# Altium PCB PCB1.PcbDoc
Units mil, origin at the board's own origin, x right, y up, seen from the top; angles counter-clockwise.
Board outline 1735 x 2140 mil, 2 copper layers (Top Layer, Bottom Layer); 28 components, 23 nets, 98 pads, 74 vias.
Unrouted connection lines stored in the file: 8.
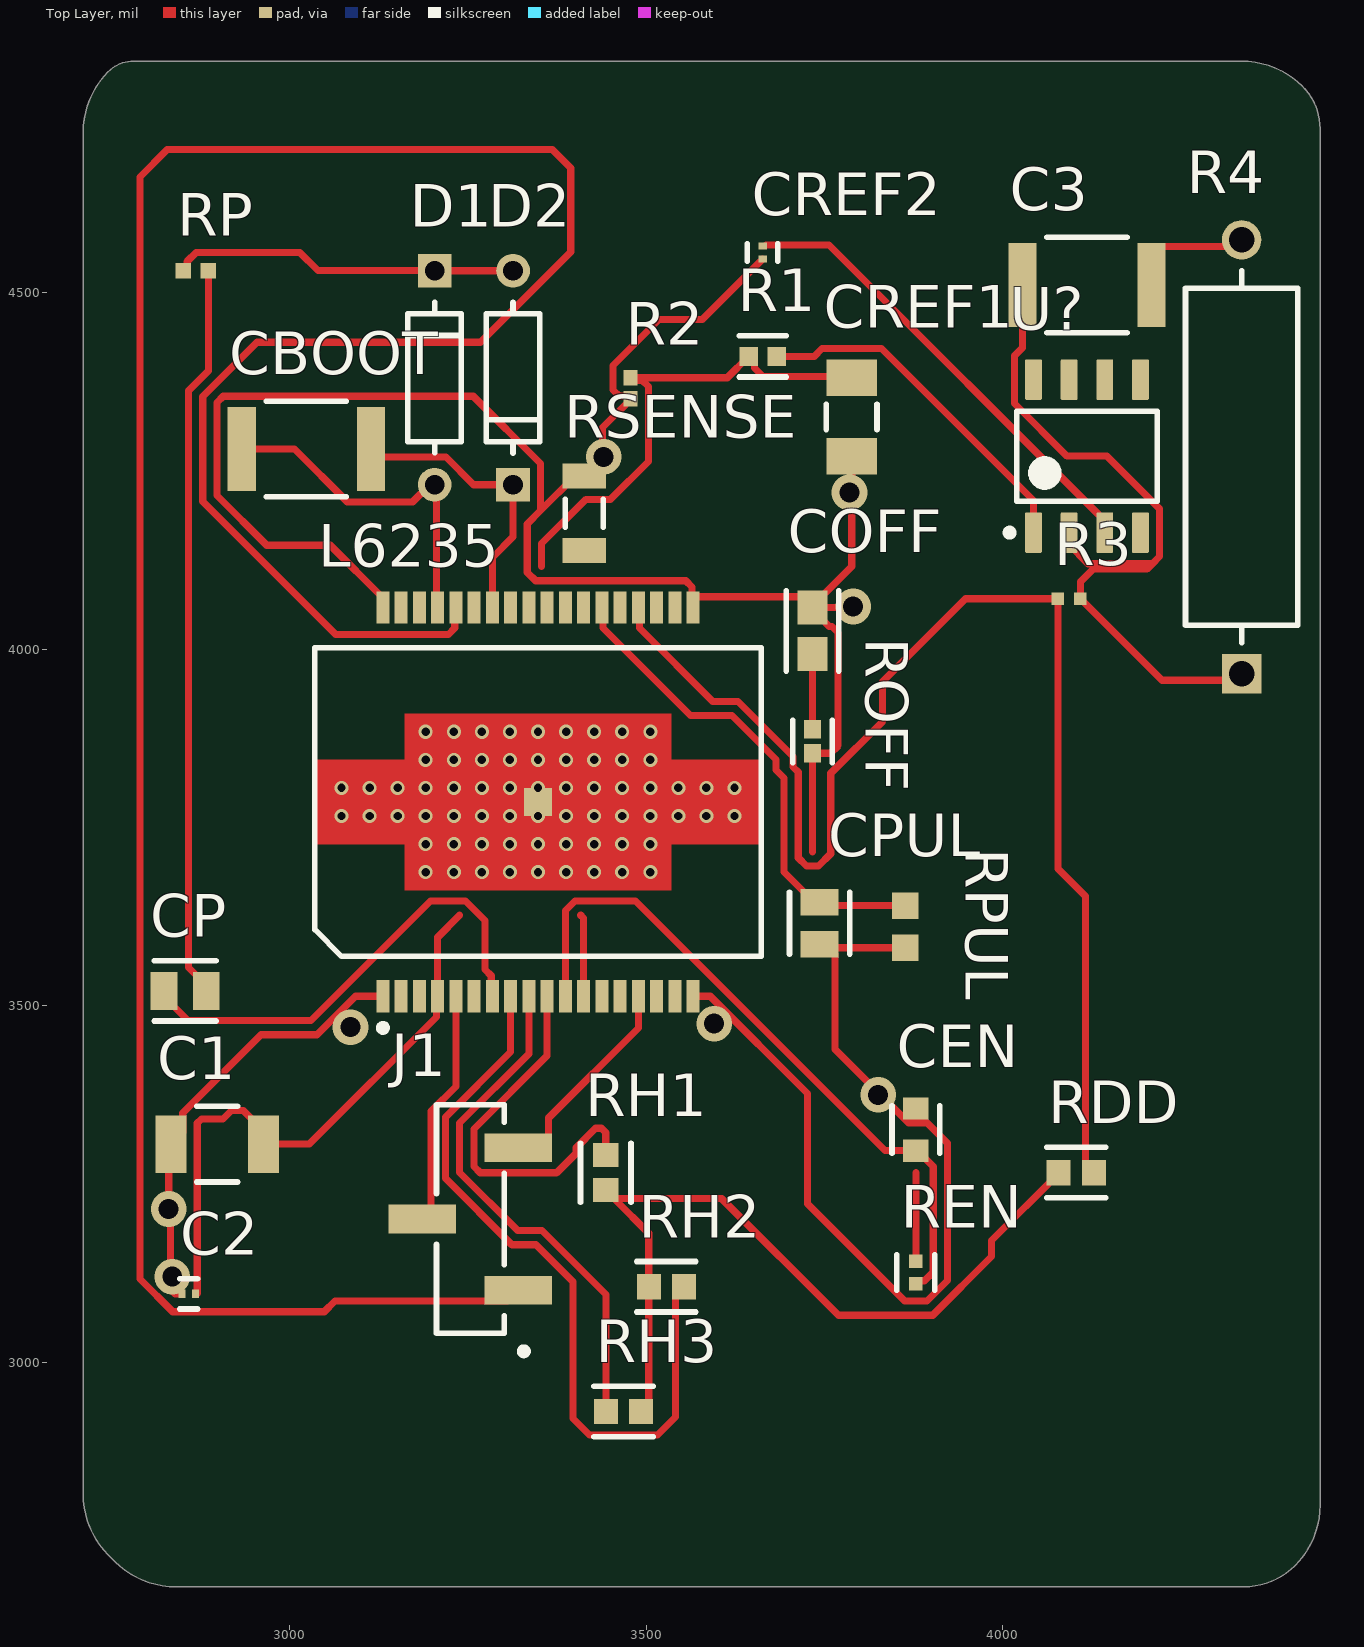
[diagram p0: Top Layer view]
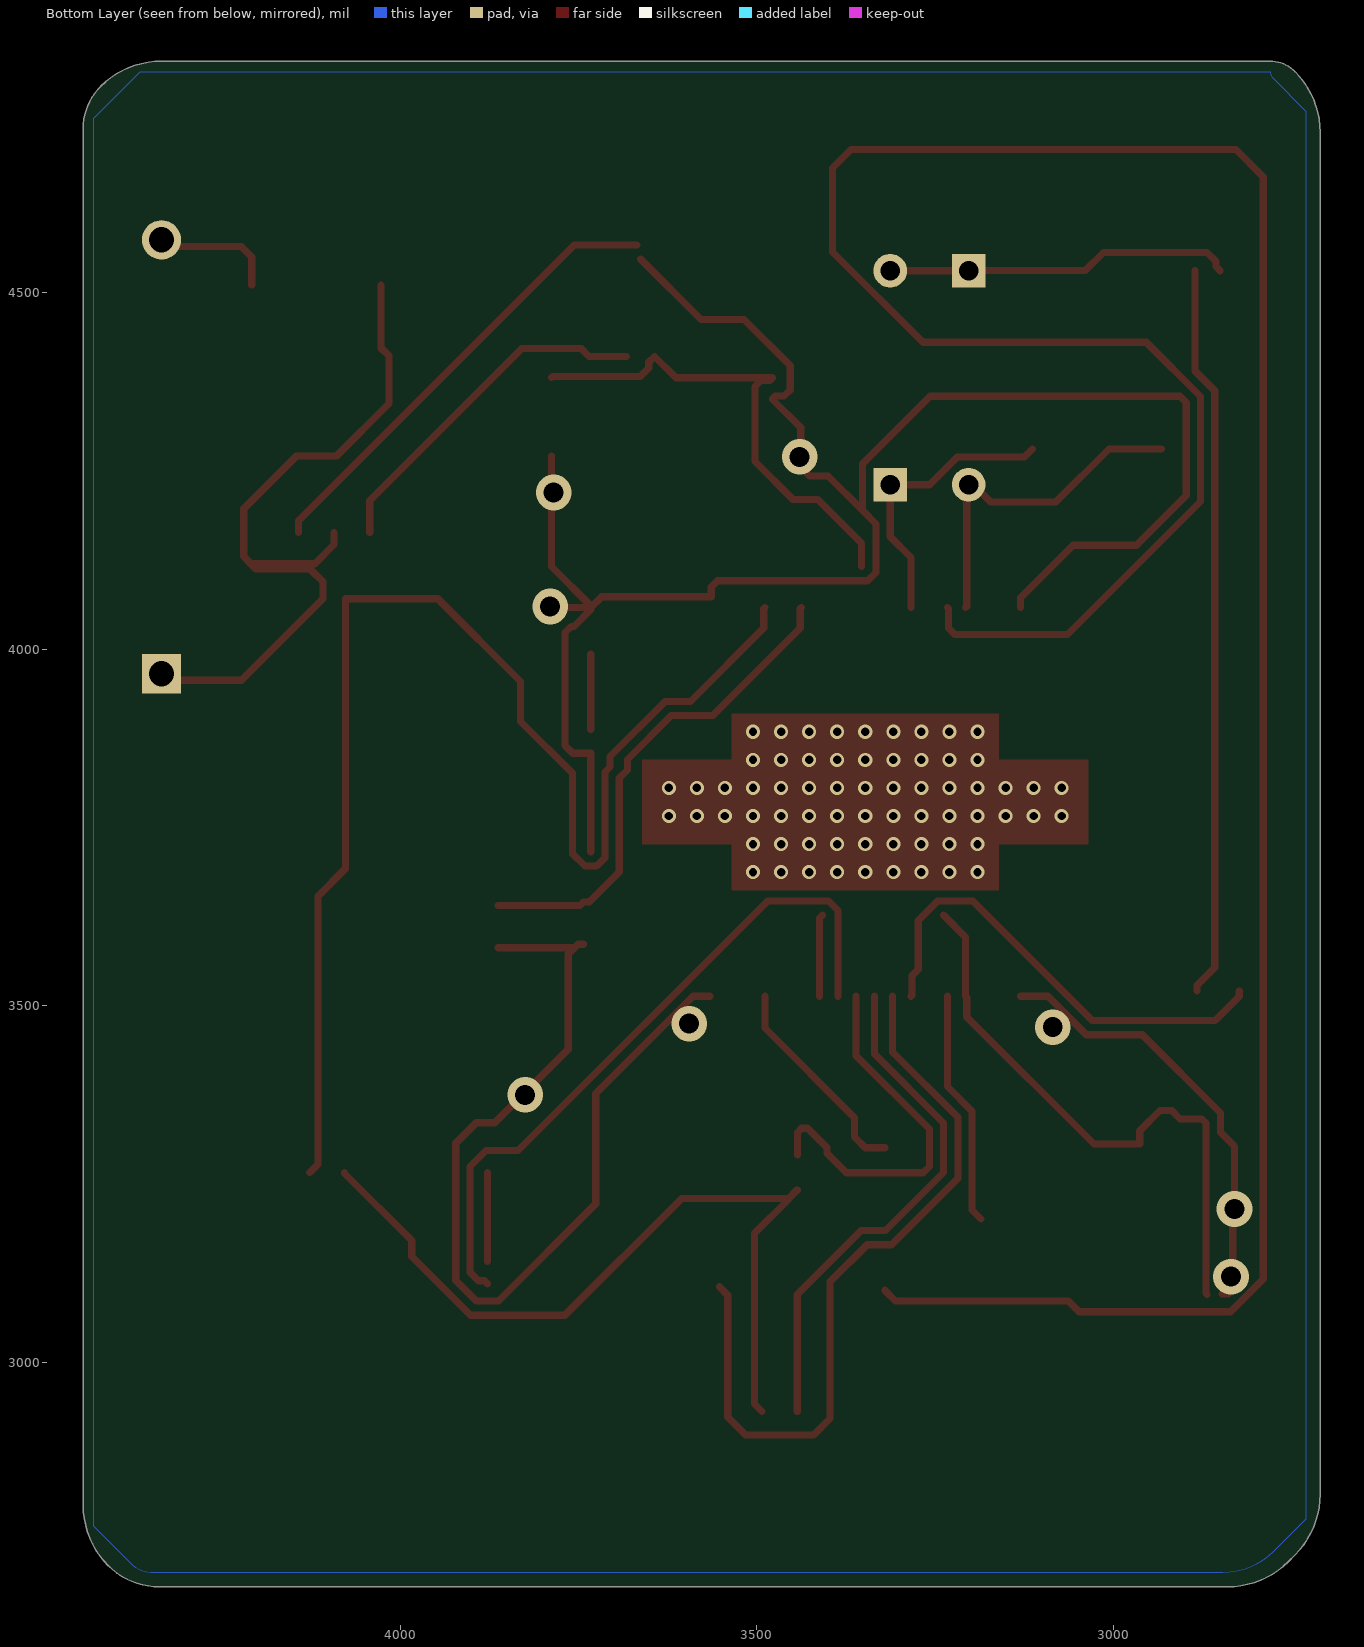
[diagram p1: Bottom Layer view, seen from below]
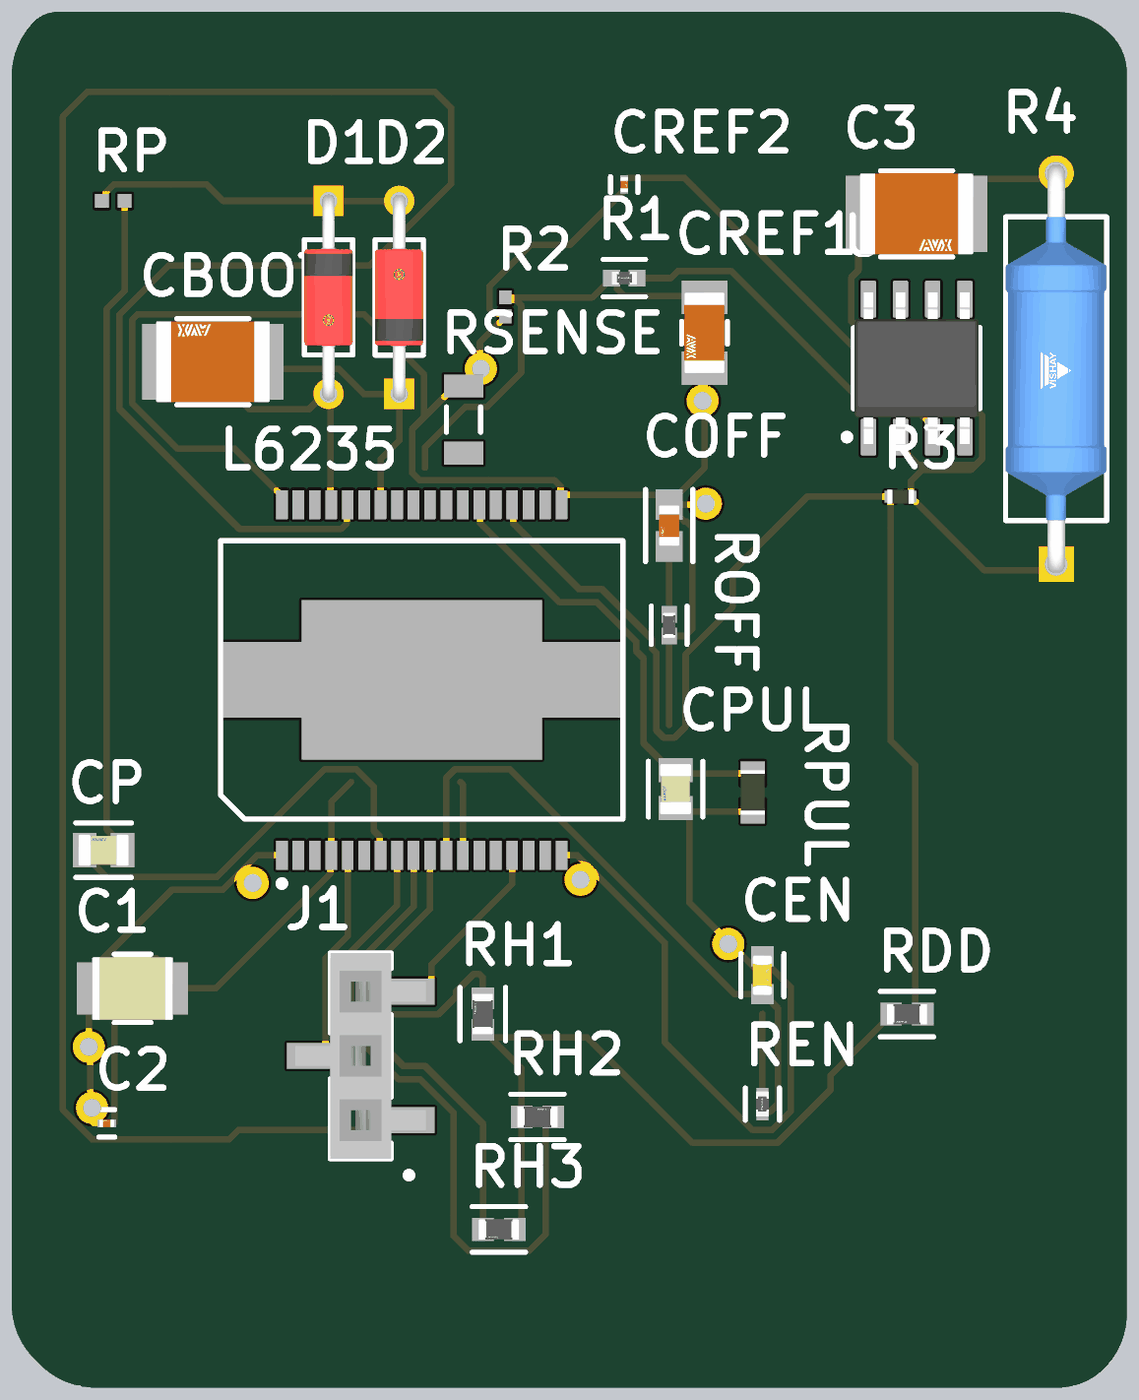
[diagram p2: 3D render of the assembled board from above, using the file's embedded part models]

## Layer stack, top to bottom
Top Solder: solder mask 0.4, Solder Resist, Dk 3.5
Top Layer: signal copper 1.4
Dielectric 1: dielectric 12.6, FR-4, Dk 4.8
Bottom Layer: signal copper 1.4
Bottom Solder: solder mask 0.4, Solder Resist, Dk 3.5

## Board outline
2745.36,2729.64 cw(c2830.71,2815) 2710,2815 2710,4725 cw(c2830.71,4725) 2745.36,4810.36 cw(c2780.71,4775) 2780.71,4825 4335,4825 cw(c4335,4704.29) 4420.36,4789.64 cw(c4360.86,4730.15) 4445,4730.15 4445,2800 cw(c4324.29,2800) 4409.64,2714.64 cw(c4338.08,2786.21) 4338.08,2685 2840,2685 cw(c2840,2805.71) 2754.64,2720.36

## Design rules (kind name [scope] priority, off if disabled: settings)
Clearance [All] p1: gap=10 ignorepadtopadclearanceinfootprint=FALSE except(0: Arc-Hole Track-Hole SMDPad-Hole THPad-Hole Via-Hole Fill-Hole Poly-Hole Region-Hole Text-Hole)
PolygonConnect [All] p1: connectstyle=Relief reliefconductorwidth=10 reliefentries=4 polygonreliefangle="90 Angle" airgapwidth=10
RoutingVias [All] p1: holewidth=28 width=50 viastyle="Through Hole" minholewidth=28 minwidth=50 maxholewidth=28 maxwidth=50
SolderMaskExpansion [All] p1: expansion=4 istentingtop=FALSE
Width [All] p1: maxlimit=10 minlimit=10 preferedwidth=10
30 further rules are at their usual default settings.

## Components (designator, comment, footprint, x,y, rotation, side; value= is the part's Value field where it differs from the comment)
C1 "100uF" FP-GRM32-0_3-MFG 2898,3305.94 r0 top
C2 "100nF" FP-GRM033-0_03-MFG 2858,3095.94 r180 top
C3 "220nF" FP-1812-L_4_5_0_3-W_3_2_0-MFG 4118,4510.94 r0 top
CBOOT "220nF" FP-1812-L_4_5_0_3-W_3_2_0-MFG 3023,4280.94 r180 top
CEN "5.6nF" FP-CC0603-DA-MFG 3878,3326.42 r90 top value="5.6 nF"
COFF "1nF" FP-0603-L_1_6_0_15-W_0_81-IPC_A 3733,4025.94 r270 top
CP "10nF" FP-C0805C-DN-MFG 2853,3520.94 r0 top value="10,000 pF"
CPUL "10nF" FP-C0805C-DN-MFG 3743,3615.94 r90 top value="10,000 pF"
CREF1 "33nF" FP-1206-L_3_2_0_2-W_1_6_0-IPC_B 3788,4325.94 r270 top
CREF2 "100nF" FP-GRM033-0_03-MFG 3663,4556.59 r90 top
D1 "1N4148" FP-017AG-MFG 3203,4381.06 r270 top
D2 "1N4148" FP-017AG-MFG 3313,4380.94 r90 top
J1 "connectorx3" SMTC-SSW-103-22-X-S-VS 3253,3200.94 r90 top
L6235 "L6235PD013TR" STM-PowerSO36-36_V1 3348,3785.94 r0 top
R1 "5.6k" FP-ERJ2RK-IPC_A 3663.23,4410.94 r0 top
R2 "1.8k" RESC1005X40X25LL10T10 3478,4366.18 r270 top
R3 "4.7k" RESC1005X40X25LL05T05 4093,4070.94 r180 top
R4 "1M" FP-HVR37-MFG 4335,4270 r90 top
RDD "1k" FP-ERA3A-IPC_C 4103,3265.94 r180 top
REN "100k" FP-ERJ2RK-IPC_C 3878,3125.94 r90 top
RH1 "10k" FP-ERA3A-IPC_C 3443,3265.94 r90 top
RH2 "10k" FP-ERA3A-IPC_C 3528,3105.94 r0 top
RH3 "10k" FP-ERA3A-IPC_C 3468,2930.94 r180 top
ROFF "33k" FP-ERA2A-IPC_B 3733,3870.94 r270 top
RP "100" RESC1005X40X25NL05T05 2868,4530.94 r0 top
RPUL "47k" RESC1608X55X30NL15T15 3863,3610.94 r270 top
RSENSE "0.3" RESC3216X70X50LL05T20 3413,4190.94 r270 top
U? "RC4580IDR" D0008A_N 4118,4270.94 r90 top

## Footprints (in the part's own frame and the unit in brackets; to place one, negate y for a bottom-side part, rotate by r counter-clockwise, add the part's x,y. Pads: shape width x height; smd on the part's side, far side on the other; paste and mask are expansions set on the pad)
D0008A_N [mm] "SOIC, 8-Leads, Body 5x4mm, Pitch 1.27mm, IPC Medium Density"
  rrect17% 1.45x0.6 smd: 1(-2.725,1.905) 2(-2.725,0.635) 3(-2.725,-0.635) 4(-2.725,-1.905) 5(2.725,-1.905) 6(2.725,-0.635) 7(2.725,0.635) 8(2.725,1.905)
  silkscreen extent -2.85,-2.5 1.6,2.88, body extent -3,-2.45 3,2.45, height 1.63
FP-017AG-MFG [mm]
  rect 1.2x1.2 hole 0.7 paste-1000 mask+0: 1(-3.813,0)
  round 1.2 hole 0.7 paste-1000 mask+0: 2(3.813,0)
  silkscreen extent -2.68,-0.95 2.68,0.95, body extent -4.51,-1.05 4.51,1.05, height 0.25
FP-0603-L_1_6_0_15-W_0_81-IPC_A [mil]
  rect 47.5x42.06 smd paste+0 mask+0: 1(-32.51,0) 2(32.51,0)
  silkscreen extent -56,-37 56,37, body extent -76,-41 76,41, height 10
FP-1206-L_3_2_0_2-W_1_6_0-IPC_B [mil]
  rect 51.36x71.11 smd paste+0 mask+0: 1(-55.15,0) 2(55.15,0)
  silkscreen extent -18,-36 18,36, body extent -91,-45 91,45, height 10
FP-1812-L_4_5_0_3-W_3_2_0-MFG [mm]
  rect 1x3 smd paste+0 mask+0: 1(-2.3,0) 2(2.3,0)
  silkscreen extent -1.43,-1.7 1.43,1.7, body extent -2.9,-1.8 2.9,1.8, height 0.25
FP-C0805C-DN-MFG [mm]
  rect 0.95x1.35 smd paste+0 mask+0: 1(-0.75,0) 2(0.75,0)
  silkscreen extent -1.1,-1.07 1.1,1.07, body extent -1.4,-0.85 1.4,0.85, height 0.25
FP-CC0603-DA-MFG [mm]
  rect 0.8x0.9 smd paste+0 mask+0: 1(-0.75,0) 2(0.75,0)
  silkscreen extent -0.85,-0.85 0.85,0.85, body extent -1.35,-0.75 1.35,0.75, height 0.25
FP-ERA2A-IPC_B [mil]
  rect 25.97x24.25 smd paste+0 mask+0: 1(-16.78,0) 2(16.78,0)
  silkscreen extent -30,-28 30,28, body extent -36,-18 36,18, height 10
FP-ERA3A-IPC_C [mil]
  rect 33.66x35.68 smd paste+0 mask+0: 1(-24.63,0) 2(24.63,0)
  silkscreen extent -41,-35 41,35, body extent -45,-24 45,24, height 10
FP-ERJ2RK-IPC_A [mil]
  rect 26.31x26.48 smd paste+0 mask+0: 1(-19.77,0) 2(19.77,0)
  silkscreen extent -33,-29 33,29, body extent -41,-21 41,21, height 10
FP-ERJ2RK-IPC_C [mil]
  rect 18.43x18.6 smd paste+0 mask+0: 1(-15.83,0) 2(15.83,0)
  silkscreen extent -25,-27 25,27, body extent -29,-15 29,15, height 10
FP-GRM32-0_3-MFG [mm]
  rect 1.1x2.05 smd paste+0 mask+0: 1(-1.65,0) 2(1.65,0)
  silkscreen extent -0.72,-1.35 0.72,1.35, body extent -2.3,-1.45 2.3,1.45, height 0.25
FP-GRM033-0_03-MFG [mm]
  rect 0.25x0.3 smd paste+0 mask+0: 1(-0.238,0) 2(0.238,0)
  silkscreen extent -0.32,-0.54 0.32,0.54, body extent -0.46,-0.27 0.46,0.27, height 0.25
FP-HVR37-MFG [mm]
  rect 1.4x1.4 hole 0.9 paste-1000 mask+0: 1(-7.73,0)
  round 1.4 hole 0.9 paste-1000 mask+0: 2(7.73,0)
  silkscreen extent -6.63,-2 6.63,2, body extent -8.53,-2.1 8.53,2.1, height 0.25
RESC1005X40X25LL05T05 [mm] "Chip Resistor, 2-Leads, Body 1.05x0.55mm, IPC High Density"
  rect 0.45x0.45 smd: 1(-0.4,0) 2(0.4,0)
  body extent -0.53,-0.28 0.53,0.28, height 0.4
RESC1005X40X25LL10T10 [mm] "Chip Resistor, 2-Leads, Body 1.00x0.50mm, IPC High Density"
  rect 0.55x0.5 smd: 1(-0.375,0) 2(0.375,0)
  body extent -0.55,-0.3 0.55,0.3, height 0.4
RESC1005X40X25NL05T05 [mm] "Chip Resistor, 2-Leads, Body 1.00x0.50mm, IPC Medium Density"
  rect 0.55x0.55 smd: 1(-0.45,0) 2(0.45,0)
  body extent -0.53,-0.27 0.53,0.28, height 0.4
RESC1608X55X30NL15T15 [mm] "Chip Resistor, 2-Leads, Body 1.75x0.95mm, IPC Medium Density"
  rect 0.95x0.95 smd: 1(-0.75,0) 2(0.75,0)
  body extent -0.87,-0.48 0.87,0.48, height 0.55
RESC3216X70X50LL05T20 [mm] "Chip Resistor, 2-Leads, Body 3.20x1.60mm, IPC High Density"
  rect 0.9x1.55 smd: 1(-1.325,0) 2(1.325,0)
  silkscreen extent -0.5,-0.67 0.5,0.67, body extent -1.63,-0.82 1.62,0.82, height 0.7
SMTC-SSW-103-22-X-S-VS [mm] "SQ Post Socket, 3 Pins, Vertical, 2.54mm Pitch, Female"
  rect 1.02x2.41 smd: 1(-2.54,-1.715) 2(0,1.715) 3(2.54,-1.715)
  silkscreen extent -4.84,-2.03 4.07,1.21, body extent -4.06,-2.58 4.06,2.58, height 9.78
STM-PowerSO36-36_V1 [mm] "SOP, 36-Leads, Body 15.9x11mm, Pitch 0.65mm"
  rect 0.46x1.15 smd: 1(-5.525,-6.925) 2(-4.875,-6.925) 3(-4.225,-6.925) 4(-3.575,-6.925) 5(-2.925,-6.925) 6(-2.275,-6.925) 7(-1.625,-6.925) 8(-0.975,-6.925) 9(-0.325,-6.925) 10(0.325,-6.925) 11(0.975,-6.925) 12(1.625,-6.925) 13(2.275,-6.925) 14(2.925,-6.925) 15(3.575,-6.925) 16(4.225,-6.925) 17(4.875,-6.925) 18(5.525,-6.925) 19(5.525,6.925) 20(4.875,6.925) 21(4.225,6.925) 22(3.575,6.925) 23(2.925,6.925) 24(2.275,6.925) 25(1.625,6.925) 26(0.975,6.925) 27(0.325,6.925) 28(-0.325,6.925) 29(-0.975,6.925) 30(-1.625,6.925) 31(-2.275,6.925) 32(-2.925,6.925) 33(-3.575,6.925) 34(-4.225,6.925) 35(-4.875,6.925) 36(-5.525,6.925)
  rect 1x1 smd paste-2 mask+0: 37(0,0)
  Top Layer region: -7.95,1.5 -4.75,1.5 -4.75,3.15 4.75,3.15 4.75,1.5 7.95,1.5 7.95,-1.5 4.75,-1.5 4.75,-3.15 -4.75,-3.15 -4.75,-1.5 -7.95,-1.5
  silkscreen extent -7.95,-8.17 7.95,5.5, body extent -7.95,-5.5 7.95,5.5, height 3.6

## Part data
C1: library part CMP-2000-05259-2, "CAP CER 100UF 6.3V X5R 1210", 3DS Part Number=220-00002, Manufacturer=Murata, Manufacturer Part Number=GRM32ER60J107ME20L, Package=GRM32-0.3, Temperature="-55°C to +85°C", Temperature Characteristic=X5R, Temperature Coefficient=15%, Temperature Range High=+85°C, Temperature Range Low=-55°C, Tolerance=20%, Voltage=6.3V, Automotive=No, Capacitance=100uF, Category=Cap, ComponentLink2Description=Datasheet, ComponentLink2URL=https://search.murata.co.jp/Ceramy/image/img/A01X/G101/ENG/GRM32ER60J107ME20-01.pdf, Device Class L1="Passive Components", Device Class L2=Capacitors, Device Class L3="Ceramic Capacitors", Digikey Description="CAP CER 100UF 6.3V X5R 1210", Height=2.7mm, Ipc Land Pattern Name=CAPC320250X250, Lead Free=Yes, Material=Ceramic, Octopart=https://octopart.com/grm32er60j107me20l-murata-197007, RoHS=TRUE, Voltage Rating=6.3V
C2 CREF2: library part CMP-06035-000062-2, "Chip Multilayer Ceramic Capacitors for General Purpose, 0201, 0.10uF, X5R, 15%, 10%, 6.3V", Case Code (Imperial)=0201, Case Code (Metric)=0603, Dielectric=X5R, Max Operating Temperature=85°C, Min Operating Temperature=-55°C, Package Quantity=1, Tolerance=10%, Voltage=6.3V, Capacitance=100nF, Case/Package=0201, Depth=0.3mm, Height=0.3mm, Lead Free="Lead Free", Length=0.6mm, Material=Ceramic, Mount="Surface Mount", Packaging="Tape and Reel", Radiation Hardening=No, REACH SVHC="No SVHC", Termination=SMD/SMT, Thickness=0.013inch, Voltage Rating=6.3V, Voltage Rating (DC)=6.3V, Weight=6E-06oz, Width=0.012inch
C3 CBOOT: library part CMP-1040-01438-2, "General Purpose Ceramic Capacitor, 1812, 220nF, 10%, X7R, 15%, 50V", Case Code (Imperial)=1812, Case Code (Metric)=4532, Dielectric=X7R, Max Operating Temperature=125°C, Min Operating Temperature=-55°C, Package Quantity=1000, Tolerance=10%, Voltage=50V, Capacitance=220nF, Case/Package=1812, Construction=Flat, Contact Plating=Tin, Depth=3.2mm, Dissipation Factor=2.5%, Height=1.02mm, Lead Free="Lead Free", Length=4.5mm, Mount="Surface Mount", Number of Pins=2, Packaging="Tape and Reel", Radiation Hardening=No, REACH SVHC="No SVHC", RoHS Compliant=Yes, Series=1812, Termination=SMD/SMT, Thickness=0.04inch, Voltage Rating=50V, Voltage Rating (DC)=50V, Width=0.126inch
CEN: library part CMP-03422-001341-1, "Surface Mount Ceramic Multilayer Capacitor 0.0056uF 10% X7R 50V 0603 Paper T/R", Capacitance="5.6 nF", Manufacturer=YAGEO, Manufacturer Part Number=CC0603KRX7R9BB562, Package=CC0603-DA, Temperature="-55°C to +125°C", Temperature Characteristic=X7R, Temperature Coefficient=15%, Temperature Range High=+125°C, Temperature Range Low=-55°C, Tolerance=0.1, Voltage="50 V", Automotive=No, Category=Cap, ComponentLink2Description=Datasheet, ComponentLink2URL=http://www.yageo.com/documents/recent/UPY-GPHC_X7R_6.3V-to-50V_18.pdf, Device Class L1="Passive Components", Device Class L2=Capacitors, Device Class L3="Ceramic Capacitors", Digikey Description="Surface Mount Ceramic Multilayer Capacitor 0.0056uF 10% X7R 50V 0603 Paper T/R", Footprint Url=http://www.yageo.com/exep/pages/download/literatures/UPY-C_GEN_24.pdf, Height=0.9mm, Lead Free=Yes, Material=Ceramic, Mouser Description="Multilayer Ceramic Capacitors MLCC - SMD/SMT 5.6nF 50V X7R 10%", Octopart=https://octopart.com/cc0603krx7r9bb562-yageo-42336084, RoHS=TRUE, Voltage Rating="50 V"
COFF: library part CMP-2006-04378-2, "General Purpose Ceramic Capacitor, 0603, 1nF, 10%, X7R, 15%, 50V", Case Code (Imperial)=0603, Case Code (Metric)=1608, Dielectric=X7R, Dielectric Material=Ceramic, Max Operating Temperature=125°C, Min Operating Temperature=-55°C, Package Quantity=4000, Tolerance=10%, Voltage=50V, Capacitance=1nF, Case/Package=0603, Construction=Flat, Contact Plating=Tin, Depth=0.81mm, Height=0.9mm, Lead Free="Lead Free", Length=1.6mm, Mount="Surface Mount", Number of Pins=2, Packaging="Tape and Reel", Radiation Hardening=No, REACH SVHC="No SVHC", RoHS Compliant=Yes, Series=-, Termination=SMD/SMT, Thickness=0.035inch, Voltage Rating=50V, Voltage Rating (DC)=50V, Weight=7.1E-05oz, Width=0.032inch
CP CPUL: library part CMP-2007-00259-2, "CAP CER 10000PF 200V X7R 0805", Capacitance="10,000 pF", Manufacturer=KEMET, Manufacturer Part Number=C0805C103K2RACTU, Package=C0805C-DN, Temperature="-55°C to +125°C", Temperature Characteristic=X7R, Temperature Coefficient=30ppm/°C, Temperature Range High=+125°C, Temperature Range Low=-55°C, Tolerance=0.1, Voltage Rating="200 V", Automotive=No, Category=Cap, ComponentLink2Description=Datasheet, ComponentLink2URL=https://content.kemet.com/datasheets/KEM_C1003_C0G_SMD.pdf, Device Class L1="Passive Components", Device Class L2=Capacitors, Device Class L3="Ceramic Capacitors", Digikey Description="CAP CER 10000PF 200V X7R 0805", Height=0.88mm, Ipc Land Pattern Name=CAPC200125X78, Lead Free=Yes, Material=Ceramic, Mouser Description="KEMET - C0805C103K2RACTU - CAP, MLCC, X7R, 10NF, 200V, 0805", Octopart=https://octopart.com/c0805c103k2ractu-kemet-9138347, RoHS=TRUE
CREF1: library part CMP-04427-000521-1, "General Purpose Ceramic Capacitor, 1206, 33nF, 10%, X7R, 15%, 50V", Case Code (Imperial)=1206, Case Code (Metric)=3216, Dielectric=X7R, Dielectric Material=Ceramic, Max Operating Temperature=125°C, Min Operating Temperature=-55°C, Package Quantity=1, Tolerance=10%, Voltage=50V, Capacitance=33nF, Case/Package=1206, Construction=Flat, Contact Plating=Tin, Depth=1.6mm, Dissipation Factor=2.5%, Height=0.94mm, Lead Free="Lead Free", Length=3.2mm, Mount="Surface Mount", Number of Pins=2, Packaging="Tape and Reel", RoHS Compliant=Yes, Series=-, Termination=SMD/SMT, Thickness=0.037inch, Voltage Rating=50V, Voltage Rating (DC)=50V, Width=1.6mm
D1 D2: library part CMP-07163-000046-1, "DIODE GEN PURP 100V 200MA DO35", Average Rectified Current=200mA, Capacitance=4pF, Case/Package=DO-35, Current=4A, Forward Current=300mA, Forward Voltage=1V, Max Forward Surge Current (Ifsm)=1A, Max Operating Temperature=175°C, Max Power Dissipation=500mW, Max Repetitive Reverse Voltage (Vrrm)=100V, Max Reverse Current=5uA, Min Operating Temperature=-65°C, Package Quantity=2000, Contact Plating=Tin, Current Rating=200mA, Diameter=1.91mm, Element Configuration=Single, Height=4.56mm, Lead Free="Lead Free", Length=4.56mm, Max Reverse Voltage (DC)=100V, Max Surge Current=4A, Mount="Through Hole", Number of Pins=2, Output Current=200mA, Outside Diameter=1.85mm, Packaging=Bulk, Peak Non-Repetitive Surge Current=4A, Polarity=Standard, Power Dissipation=500mW, Radiation Hardening=No, REACH SVHC="No SVHC", Recovery Time=4ns, Reverse Recovery Time=4ns, Reverse Voltage=100V, Series=-, Voltage=100V, Voltage Rating (DC)=100V, Weight=0.01lb, Width=1.91mm
J1: library part CMP-1023-00333-1, "SQ Post Socket, Surface Mount, Vertical, -55 to 125 degC, 2.54 mm Pitch, 3-Pin, Female, RoHS", Manufacturer=Samtec, PartNumber=SSW-103-22-G-S-VS, Temperature Range="-55 to 125 degC", ComponentLink1Description="Manufacturer URL", ComponentLink1URL=http://www.samtec.com, ComponentLink2Description=Datasheet, ComponentLink2URL=http://www.samtec.com/documents/webfiles/pdf/SSW_SM.PDF, ComponentLink3Description="Package Specification", ComponentLink3URL=http://www.samtec.com/documents/webfiles/cpdf/SSW-1XX-22-XXX-X-XX-XX-X-XX-MKT.pdf, DatasheetVersion=F-214, Mounting Technology="Surface Mount", Orientation=Vertical, PackageDescription=".100 [2.54] Surface Mount Assembly", PackageReference=SSW-103-22-X-S-VS, PackageVersion="AS, 1/1997", Pitch="2.54 mm", RoHS=True
L6235: library part CMP-1005-00003-1, "DMOS Driver for 3-Phase Brushless DC Motor, 12 to 52 V, 2.8 A, -40 to 150 degC, 36-Pin SOP (PowerSO36), RoHS", Manufacturer=STMicroelectronics, Operating Temperature Range="-40 to 150 degC", Supply Voltage="12 to 52 V", ComponentLink1Description="Manufacturer URL", ComponentLink1URL=http://www.st.com/, ComponentLink2Description=Datasheet, ComponentLink2URL=http://www.st.com/st-web-ui/static/active/en/resource/technical/document/datasheet/CD00002347.pdf, ComponentLink3Description="Package Specification", ComponentLink3URL=http://www.icbuy.com/education/package/mode_name/upload/education/package/061104/1157210448562001162612641.pdf, DatasheetVersion="Rev. 2", Iout="2.8 A", Is="5 mA Typ.", Mounting Technology="Surface Mount", PackageDescription="36-Pin Small Outline Package, Body 15.9 x 11 mm, Pitch 0.65 mm", PartNumber=L6235PD013TR, RoHS=TRUE, Vth(OFF)="1.3 V Typ.", Vth(ON)="1.8 V Typ."
R1: library part CMP-1011-00595-3, "RES SMD 5.6K OHM 1% 1/10W 0402", Case Code (Imperial)=0402, Case Code (Metric)=1005, Max Operating Temperature=155°C, Max Power Dissipation=100mW, Min Operating Temperature=-55°C, Package Quantity=1, Resistance=5.6kR, Resistance Tolerance=1%, Resistor Type="Thick Film", Temperature Coefficient=100ppm/°C, Voltage Rating=50V, Case/Package=0402, Construction=Rectangular, Contact Plating=Tin, Depth=0.5mm, Features="Automotive AEC-Q200", Height=0.35mm, Lead Free="Lead Free", Length=1mm, Military Standard=Not, Mount="Surface Mount", Number of Pins=2, Number of Terminations=2, Packaging="Tape and Reel", Power Rating=100mW, Radiation Hardening=No, REACH SVHC=Yes, RoHS Compliant=Yes, Series=ERJ, Technology="THICK FILM", Termination=SMD/SMT, Tolerance=1%, Voltage Rating (DC)=50V, Weight=2.8E-05oz, Width=0.02inch
R2: library part CMP-2002-05787-1, Manufacturer=Panasonic, Part Number=ERA-2AEB182X
R3: library part CMP-2002-01154-4, "Chip Resistor, 4.7 KOhm, +/- 1%, 0.1 W, -55 to 155 degC, 0402 (1005 Metric), RoHS, Tape and Reel", Case Code (Imperial)=0402, Case Code (Metric)=1005, Max Operating Temperature="155 degC", Min Operating Temperature="-55 degC", Package Quantity=1, PartNumber=ERJ-2RKF4701X, Power Rating="100 mW", Resistance="4.7 KOhm", Tolerance=1%, Voltage Rating="50 V", Case\/Package=0402, ComponentLink1Description="Manufacturer URL", ComponentLink1URL=http://www.panasonic.com/, ComponentLink2Description=Datasheet, ComponentLink2URL=http://industrial.panasonic.com/cdbs/www-data/pdf/RDA0000/AOA0000C86.pdf, DatasheetVersion=04/2015, Height="0.35 mm", Length="1 mm", Mount="Surface Mount", Mounting Technology="Surface Mount", PackageDescription="2-Pin Surface Mount Device, Body 1 x 0.5 mm", PackageReference=0402, Packaging="Cut Tape", Pins=2, Radiation Hardening=No, REACH SVHC=Yes, RoHSCompliant=true, Width="0.5 mm"
R4: library part CMP-00030-42845042-1, "HVR3700001004FR500 Fixed Resistor, Metal Film, 0.5W, 1000000ohm, 3500V, 1% +/-Tol, 200ppm/Cel, Through Hole Mount", Case/Package=Axial, Max Operating Temperature=155°C, Max Power Dissipation=500mW, Min Operating Temperature=-55°C, Resistance=1MΩ, Temperature Coefficient=200ppm/°C, Tolerance=1%, Voltage Rating=3.5kV, Composition="Metal Film", Features="Flame Retardant Coating", Height=4mm, Lead Diameter=780µm, Lead Free="Lead Free", Length=10.0076mm, NexarPartId=42845042, Number of Pins=2, Number of Terminations=2, Packaging="Cut Tape (CT)", Power Rating=500mW, Radiation Hardening=No, REACH SVHC=Unknown, RoHS=Compliant, Schedule B="8533210090, 8533210090", Termination=Axial, Voltage Rating (DC)=3.5kV
RDD: library part CMP-2000-00873-2, "RES SMD 1K OHM 0.1% 1/10W 0603", Case Code (Imperial)=0603, Case Code (Metric)=1608, Max Operating Temperature=155°C, Max Power Dissipation=100mW, Min Operating Temperature=-55°C, Package Quantity=5000, Resistance=1kR, Resistance Tolerance=0.1%, Resistor Type="Thin Film", Temperature Coefficient=25ppm/°C, Voltage Rating=75V, Case/Package=0603, Construction=Rectangular, Contact Plating=Tin, Depth=0.8mm, Height=0.45mm, Length=1.6mm, Military Standard=Not, Mount="Surface Mount", Number of Pins=2, Number of Terminations=2, Packaging="Tape and Reel", Power Rating=100mW, Radiation Hardening=No, REACH SVHC="No SVHC", RoHS Compliant=Yes, Series=ERA-3A, Size Code=0603, Technology="METAL FILM", Termination=SMD/SMT, Tolerance=0.1%, Width=0.8mm
REN: library part CMP-2002-00608-4, "RES SMD 100K OHM 1% 1/10W 0402", Case Code (Imperial)=0402, Case Code (Metric)=1005, Max Operating Temperature=155°C, Max Power Dissipation=100mW, Min Operating Temperature=-55°C, Package Quantity=1, Resistance=100kR, Temperature Coefficient=100ppm/°C, Tolerance=1%, Voltage Rating=50V, Case/Package=0402, Composition="Thick Film", Contact Plating=Tin, Depth=0.5mm, Features="Automotive AEC-Q200", Height=0.35mm, Lead Free="Lead Free", Length=1mm, Military Standard=Not, Mount="Surface Mount", Number of Pins=2, Number of Terminations=2, Packaging="Tape and Reel", Power Rating=100mW, Radiation Hardening=No, REACH SVHC="No SVHC", Termination=SMD/SMT, Voltage Rating (DC)=50V, Width=0.5mm
RH1 RH2 RH3: library part CMP-2000-00874-2, "RES SMD 10K OHM 0.1% 1/10W 0603", Case Code (Imperial)=0603, Case Code (Metric)=1608, Max Operating Temperature=155°C, Max Power Dissipation=100mW, Min Operating Temperature=-55°C, Package Quantity=5000, Resistance=10kR, Resistance Tolerance=0.1%, Resistor Type="Thin Film", Temperature Coefficient=25ppm/°C, Voltage Rating=75V, Case/Package=0603, Construction=Rectangular, Contact Plating=Tin, Depth=0.8mm, Height=0.45mm, Lead Free="Lead Free", Length=1.6mm, Military Standard=Not, Mount="Surface Mount", Number of Pins=2, Number of Terminations=2, Packaging="Tape and Reel", Power Rating=100mW, Radiation Hardening=No, REACH SVHC="No SVHC", RoHS Compliant=Yes, Series=ERA-3A, Size Code=0603, Technology="METAL FILM", Termination=SMD/SMT, Tolerance=0.1%, Voltage Rating (DC)=75V, Width=0.8mm
ROFF: library part CMP-2002-05885-2, "RES SMD 33K OHM 0.1% 1/16W 0402", Case Code (Imperial)=0402, Case Code (Metric)=1005, Max Operating Temperature=155°C, Max Power Dissipation=63mW, Min Operating Temperature=-55°C, Package Quantity=10000, Resistance=33kR, Resistance Tolerance=0.1%, Resistor Type="Thin Film", Temperature Coefficient=25ppm/°C, Voltage Rating=50V, Voltage Rating (DC)=25V, Case/Package=0402, Construction=Rectangular, Contact Plating=Tin, Depth=0.5mm, Height=0.35mm, Lead Free="Lead Free", Length=1mm, Military Standard=Not, Mount="Surface Mount", Number of Pins=2, Number of Terminations=2, Packaging="Tape and Reel", Power Rating=63mW, Radiation Hardening=No, RoHS Compliant=Yes, Series=ERA-2A, Technology="METAL FILM", Termination=SMD/SMT, Tolerance=0.1%, Width=0.5mm
RP: library part CMP-2002-01176-1, Manufacturer=Panasonic, Part Number=ERT-J0EA101J
RPUL: library part CMP-2000-00523-2, "Chip Resistor, 47 KOhm, +/- 1%, 0.1 W, -55 to 155 degC, 0603 (1608 Metric), RoHS, Tape and Reel", Case Code (Imperial)=0603, Case Code (Metric)=1608, Colour=Red, Forward Current="20 mA", Forward Voltage="2.1 V", Max Operating Temperature="100 degC", Min Operating Temperature="-40 degC", Package Quantity=3000, Power Rating="90 mW", Case\Package=0603, ComponentLink1Description="Manufacturer URL", ComponentLink1URL=http://www.panasonic.com/, ComponentLink2Description=Datasheet, ComponentLink2URL=http://industrial.panasonic.com/cdbs/www-data/pdf/RDA0000/AOA0000C86.pdf, DatasheetVersion=Apr-15, Height="0.6 mm", Illumination Colour=Red, Length="1.6 mm", Lens Style=Clear, Luminous Intensity="63 mcd", Mount="Surface Mount", Nominal Vf="2.1 V", Nominal Wavelength="639 nm", PackageDescription="2-Pin Surface Mount Device, Body 1.6 x 0.85 mm", PackageReference=0603, Packaging="Tape and Reel", Pins=2, Radiation Hardening=No, REACH SVHC="No SVHC", RoHSCompliant=true, Viewing Angle="160 degrees", Width="0.8 mm"
RSENSE: library part CMP-2003-00750-1, Manufacturer=Panasonic, Part Number=ERJ8BQFR30V
U?: library part CMP-0017-00578-2, "Dual Audio Operational Amplifier, 4 to 32 V, -40 to 85 degC, 8-pin SOIC (D8), Green (RoHS & no Sb/Br)", Manufacturer="Texas Instruments", Total Supply Voltage(Max)(+5V is 5, +/-5V is 10)=32, Total Supply Voltage(Min)(+5V is 5, +/-5V is 10)=4, CMRR(Min)(dB)=80, Code_JEDEC=MS-012, ComponentLink1Description="Manufacturer URL", ComponentLink1URL=http://www.ti.com/, ComponentLink2Description=Datasheet, ComponentLink2URL=http://www.ti.com/lit/ds/symlink/rc4580.pdf, ComponentLink3Description="Package Specification", ComponentLink3URL=http://www.ti.com/litv/pdf/msoi002j, DatasheetVersion=SLOS412C, Eco-Plan="Green (RoHS & no Sb/Br)", GBW(Typ)(MHz)=12, IIB(Max)(pA)=500000, Iq per channel(Max)(mA)=4.5, Mounting Technology="Surface Mount", Number of Channels=2, PackageDescription="8-Pin Plastic Small Outline, Body 4.9 x 3.9 mm, Pitch 1.27 mm", PackageReference=D0008A, PackageVersion="4040047-3/M, 06/2011", PartNumber=RC4580IDR, Slew Rate(Typ)(V/us)=5, Sub Family="General Purpose Amplifier, High Supply Voltage Amplifier (>=30V), Low Noise Amp (<=10nV/rtHz)", Vio (25C)(Max)(mV)=3, Vn at 1kHz(Typ)(nV/rtHz)=6.2

## Via types
v1: diameter 19.68, hole 11.81, Top Layer to Bottom Layer, 66 vias
v2: diameter 50, hole 28, Top Layer to Bottom Layer, 8 vias

## Nets (pads, with @x,y where several pads share a name; then routed paths per layer and width w, separated by ;. In a path a pad name is that pad's centre, name@x,y a point inside that pad or via, vN(x,y) a via of type N, cw(c..) or ccw(c..) an arc to the next point about the centre after c; other vN are vias at no path point)
+5V: RDD.2 RH1.1 RH2.1 RH3.1 | length 1127.3
  Top Layer w10: RH1.1 3444.01,3241.31 RH1.1@3455.84,3229.48 ; RH3.1 3503.37,2941.68 RH2.1 3503.37,3180.94 3455.84,3228.47 RH1.1@3455.84,3229.48 ; RDD.2 4078.37,3264.94 3984.17,3170.74 3984.17,3148.27 3901.8,3065.9 3769.38,3065.9 3605.79,3229.48 RH1.1@3455.84,3229.48
GND: C1.1 C2.2 CEN.2 COFF.1 CPUL.1 CREF1.2 CREF2.1 L6235.1 L6235.18 L6235.19 L6235.36 R2.2 ROFF.2 RPUL.2 RSENSE.1 | length 4695.4
  Top Layer w10: C2.2@2847.43,3095.94 2838.9,3095.94 2832.5,3102.34 2832.5,3212.5 v2(2830,3215) 2830,3302.91 2849.69,3322.6 2849.69,3349.58 2959.48,3459.37 3037.93,3459.37 3091.87,3513.31 L6235.1 ; L6235.36 3130.48,4072.17 3056.7,4145.95 2967.49,4145.95 2897.76,4215.68 2897.76,4346.21 2906.55,4355 3257.28,4355 3351.62,4260.66 3351.62,4194.53 ; L6235.18 3589.57,3513.31 3726.03,3376.85 3726.03,3222.35 3862.49,3085.9 3893.51,3085.9 3922.3,3114.68 3922.3,3307.27 3893.62,3335.94 3867.75,3335.94 3764.57,3439.12 3764.57,3572.72 CPUL.1@3755.87,3581.42 ; CREF2.1 3578.49,4462.73 3517.91,4462.73 3453.16,4397.98 3453.16,4363.9 3461.94,4355.12 3474.3,4355.12 R2.2 3478,4350.43 3438.51,4310.94 3438.51,4255.83 3425.8,4243.11 RSENSE.1 3400.2,4243.11 3351.62,4194.53 ; 3733,3715.94 ROFF.2 3758.34,3854.16 3769.03,3864.85 3769.03,4023.39 3760.24,4032.18 3756.56,4032.18 3733,4055.74 COFF.1 ; CPUL.1 3750.87,3586.42 CPUL.1@3755.87,3581.42 ; CREF1.2 3788,4116.18 3733,4061.18 COFF.1 ; v2(3790,4060) cw(c3786.28,4063.72) 3786.28,4058.46 COFF.1 ; RPUL.2 CPUL.1@3755.87,3581.42 ; 3351.62,4194.53 3333,4175.91 3333,4107.94 3344.72,4096.22 3555.2,4096.22 3563.98,4087.43 3563.98,4073.78 3717.68,4073.78 COFF.1
  other v2: 2835,3120 3825,3375 3085,3470 3595,3475 3785,4220 3440,4270
NetC3_1: C3.1 R3.1 R4.1 U?.2 | length 1087.7
  Top Layer w10: C3.1 4027.45,4423.07 4016.19,4411.81 4016.19,4344.65 4089.89,4270.94 4146.11,4270.94 4219.81,4197.24 4219.81,4130.08 ; U?.2 4093,4146.93 4119.81,4120.12 4209.85,4120.12 ; R4.1@4338,3956.61 4223.08,3956.61 R3.1 4108.75,4094.8 4126.39,4112.44 4202.17,4112.44 4209.85,4120.12 ; 4209.85,4120.12 4219.81,4130.08 ; 4209.85,4120.12 4219.81,4130.08
NetC3_2: C3.2 R4.2 | length 175
  Top Layer w10: C3.2 4208.55,4550.31 4223.24,4565 4337.72,4565 R4.2@4338,4565.28
NetCBOOT_1: CBOOT.1 D2.1 L6235.30 | length 404.5
  Top Layer w10: CBOOT.1 3124.93,4269.57 3219,4269.57 3257.74,4230.83 D2.1 3313,4157.93 3284.02,4128.96 L6235.30
NetCEN_1: CEN.1 L6235.11 L6235.27 REN.1 | length 975.2
  Top Layer w10: L6235.11 3386.39,3633.6 3399.72,3646.93 3484.8,3646.93 3834.84,3296.89 CEN.1 3879.97,3296.89 3902.3,3274.56 3902.3,3126.35 3890.28,3114.33 3882.22,3114.33 REN.1
NetCOFF_2: COFF.2 L6235.13 ROFF.1 | length 105.7
  Top Layer w10: ROFF.1 COFF.2
NetCP_1: CP.1 L6235.7 | length 663.3
  Top Layer w10: CP.1 2823.47,3513.07 2857.17,3479.37 3029.65,3479.37 3197.21,3646.93 3246.28,3646.93 3273.7,3619.51 3273.7,3550.94 3282.49,3542.16 3282.49,3514.84 L6235.7
NetCP_2: CP.2 RP.2 | length 1031.8
  Top Layer w10: CP.2 2882.53,3528.82 2857.76,3553.58 2857.76,4362.78 2885.72,4390.73 RP.2
NetCPUL_2: CPUL.2 L6235.24 RPUL.1 | length 700.5
  Top Layer w10: L6235.24 3439.1,4057.05 3439.1,4029.73 3561.87,3906.97 3620.24,3906.97 3681.62,3845.59 3681.62,3830.94 3693,3819.56 3693,3687.6 3735.13,3645.47 CPUL.2 3748,3640.47 RPUL.1
NetCREF1_1: CREF1.1 L6235.28 R1.1 R2.1 | length 704.1
  Top Layer w10: 3353,4116.22 3353,4148.22 3415.17,4210.39 3449.72,4210.39 3502.84,4263.51 3502.84,4368.46 3494.06,4377.24 3481.7,4377.24 R2.1 3613.55,4380.94 R1.1 R1.1 3651.61,4402.79 3651.61,4394.73 3663.63,4382.71 3786.39,4382.71 CREF1.1
NetD1_1: D1.1 D2.2 RP.1 | length 488.4
  Top Layer w10: RP.1 2856.11,4536.77 2856.11,4544.21 2868.68,4556.77 3013.73,4556.77 3039.32,4531.18 D1.1 3203.12,4531.06 D2.2
NetJ1_1: J1.1 L6235.32 | length 4067.6
  Top Layer w10: L6235.32 3231.31,4057.05 3231.31,4029.73 3222.52,4020.94 3064.21,4020.94 2877.76,4207.39 2877.76,4354.5 2953.91,4430.64 3267.2,4430.64 3393.86,4557.3 3393.86,4675.09 3368,4700.94 2828,4700.94 2789.77,4662.72 2789.77,3116.79 2835.61,3070.94 3048.29,3070.94 3063.21,3085.87 3305.44,3085.87 J1.1
NetJ1_2: J1.2 L6235.5 | length 332
  Top Layer w10: J1.2 3198.08,3213.54 3198.08,3352.09 3232.84,3386.85 L6235.5
NetJ1_3: J1.3 L6235.15 | length 298.1
  Top Layer w10: J1.3 3347.88,3300.94 3362.96,3316.02 3362.96,3342.95 3488.75,3468.74 L6235.15
NetL6235_8: L6235.8 RH2.2 | length 1075.3
  Top Layer w10: L6235.8 3309.61,3435.34 3218.08,3343.81 3218.08,3258.08 3311.28,3164.88 3345.31,3164.88 3397.25,3112.95 3397.25,2921.18 3420.33,2898.11 3515.67,2898.11 3540.8,2923.24 3540.8,3094.12 RH2.2
NetL6235_9: L6235.9 RH3.2 | length 727.6
  Top Layer w10: L6235.9 3335.2,3432.65 3238.08,3335.52 3238.08,3266.37 3319.56,3184.88 3353.6,3184.88 3443.37,3095.11 RH3.2
NetL6235_10: L6235.10 RH1.2 | length 534.4
  Top Layer w10: L6235.10 3360.8,3429.95 3258.08,3327.24 3258.08,3274.65 3266.87,3265.87 3374.17,3265.87 3401.52,3293.21 3401.52,3300.92 3428.86,3328.26 3437.14,3328.26 3443,3322.41 RH1.2
NetL6235_12: L6235.12 L6235.25 RSENSE.2 | length 115.3
  Top Layer w10: 3408,3626.93 3411.98,3622.95 L6235.12
NetL6235_22: L6235.22 R3.2 RDD.1 | length 1913.6
  Top Layer w10: L6235.22 3490.28,4057.05 3490.28,4029.73 3593.05,3926.97 3628.52,3926.97 3705.88,3849.61 3705.88,3834.97 3713,3827.84 3713,3707.66 3724.72,3695.94 3741.28,3695.94 3758.64,3713.3 3758.64,3826.18 3831.44,3898.98 3831.44,3954.68 3947.71,4070.94 R3.2 4077.25,3692.21 4115.8,3653.66 4115.8,3277.77 RDD.1
NetR1_2: R1.2 U?.1 | length 497.7
  Top Layer w10: R1.2 3735.4,4410.94 3746.23,4421.78 3829.77,4421.78 4043,4208.54 U?.1
"VCC =  8 - 52 Vdc": C1.2 C2.1 CBOOT.2 D1.2 L6235.4 L6235.33 | length 1329.5
  Top Layer w10: C2.1@2868.57,3095.04 2870,3096.47 2870,3335.44 2875.86,3341.3 2906.31,3341.3 2918.02,3353.01 2934.59,3353.01 2962.96,3324.65 C1.2 3027.21,3305.94 3205.72,3484.46 3205.72,3511.77 L6235.4 3207.25,3596.18 3238,3626.93 ; CBOOT.2 3006.26,4280.94 3080.32,4206.89 3172.44,4206.89 3196.49,4230.94 D1.2 3205.72,4228.23 3205.72,4060.12 L6235.33
VREF: CREF2.2 U?.3 | length 651.9
  Top Layer w10: CREF2.2@3668,4567.17 3756.23,4567.17 4143,4180.39 U?.3
pads on no net: L6235.2 L6235.3 L6235.6 L6235.14 L6235.16 L6235.17 L6235.20 L6235.21 L6235.23 L6235.26 L6235.29 L6235.31 L6235.34 L6235.35 L6235.37 REN.2 U?.4 U?.5 U?.6 U?.7 U?.8
copper on no net: | length 124.4
  Top Layer w10: 3878,3141.78 3878,3266.14
  other v1: 3190.52,3687.52 3229.89,3687.52 3269.26,3687.52 3308.63,3687.52 3348,3687.52 3387.37,3687.52 3426.74,3687.52 3466.11,3687.52 3505.48,3687.52 3190.52,3726.89 3229.89,3726.89 3269.26,3726.89 3308.63,3726.89 3348,3726.89 3387.37,3726.89 3426.74,3726.89 3466.11,3726.89 3505.48,3726.89 3072.41,3766.26 3111.78,3766.26 3151.15,3766.26 3190.52,3766.26 3229.89,3766.26 3269.26,3766.26 3308.63,3766.26 3348,3766.26 3387.37,3766.26 3426.74,3766.26 3466.11,3766.26 3505.48,3766.26 3544.85,3766.26 3584.22,3766.26 3623.59,3766.26 3072.41,3805.63 3111.78,3805.63 3151.15,3805.63 3190.52,3805.63 3229.89,3805.63 3269.26,3805.63 3308.63,3805.63 3348,3805.63 3387.37,3805.63 3426.74,3805.63 3466.11,3805.63 3505.48,3805.63 3544.85,3805.63 3584.22,3805.63 3623.59,3805.63 3190.52,3845 3229.89,3845 3269.26,3845 3308.63,3845 3348,3845 3387.37,3845 3426.74,3845 3466.11,3845 3505.48,3845 3190.52,3884.37 3229.89,3884.37 3269.26,3884.37 3308.63,3884.37 3348,3884.37 3387.37,3884.37 3426.74,3884.37 3466.11,3884.37 3505.48,3884.37

## Polygon pours and split planes (outlines as drawn)
GND on Bottom Layer "GND_L02_P002" (solid, pour order 2): 2730,2780 2775.71,2734.29 ccw(c2846.42,2805) 2846.42,2705 4350,2705 ccw(c4350,2741.21) 4375.61,2715.61 4430,2770 4430,4745 4365,4810 2780,4810 cw(c2767.93,4810) 2776.46,4801.46 2730,4755

## Silkscreen, mask and mechanical layers (free items; w line width, h text height)
Mechanical 1:
  lines w10: 2710,2815 ccw(c2830.71,2815) 2745.36,2729.64 2754.64,2720.36 ccw(c2840,2805.71) 2840,2685 4338.08,2685 ccw(c4338.08,2786.21) 4409.64,2714.64 ccw(c4324.29,2800) 4445,2800 4445,4730.15 ccw(c4360.86,4730.15) 4420.36,4789.64 ccw(c4335,4704.29) 4335,4825 3340,4825 2780.71,4825 ccw(c2780.71,4775) 2745.36,4810.36 ccw(c2830.71,4725) 2710,4725 2710,2815